# Altium PCB PCB1.PcbDoc
Units mm, origin at the board's own origin, x right, y up, seen from the top; angles counter-clockwise.
Board outline 129.79 x 36.83 mm, 2 copper layers (Top Layer, Bottom Layer); 11 components, 0 nets, 23 pads, 26 vias.
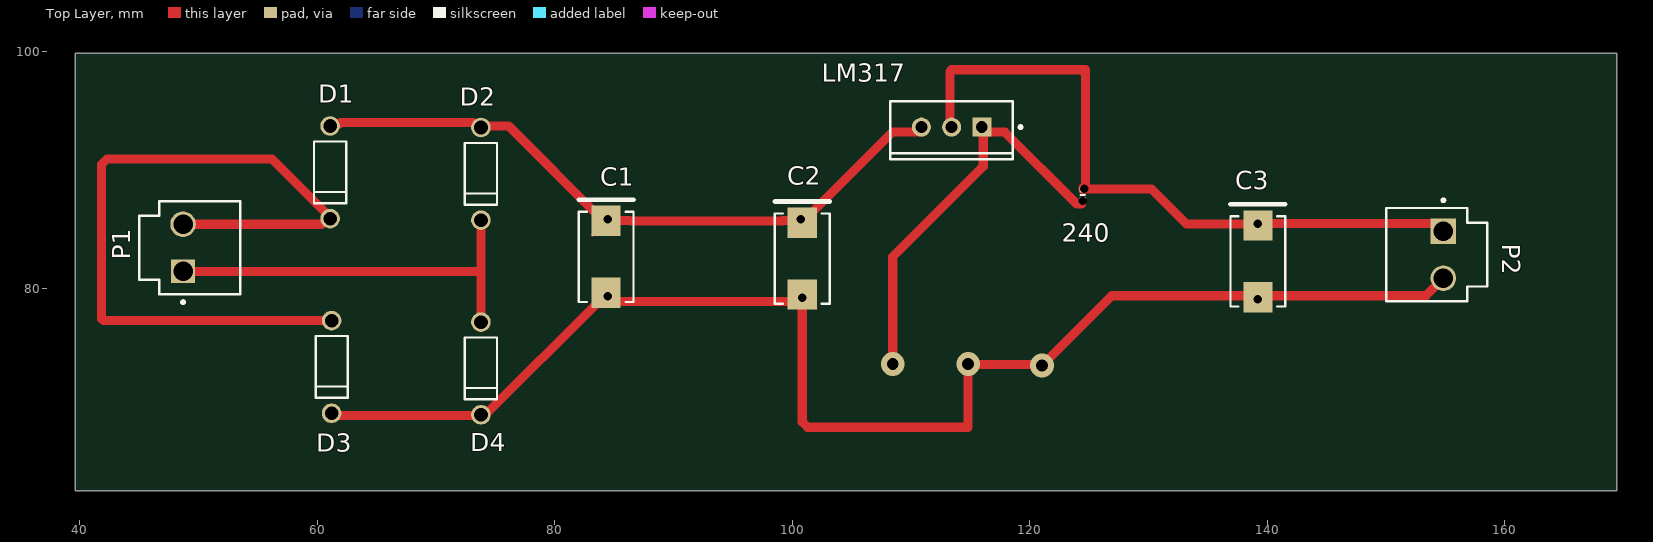
[diagram p0: Top Layer view]
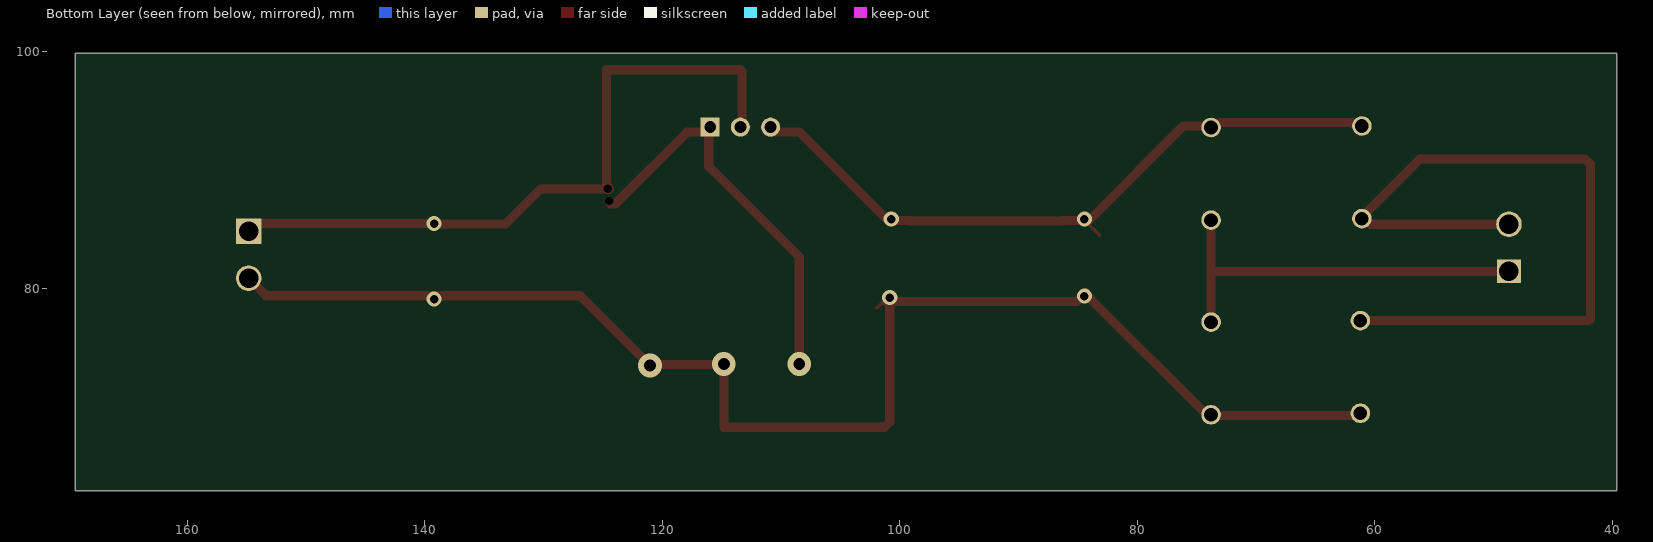
[diagram p1: Bottom Layer view, seen from below]

## Layer stack, top to bottom
Top Solder: solder mask 0.0102, Solder Resist, Dk 3.5
Top Layer: signal copper 0.0356
Dielectric 1: dielectric 0.32, FR-4, Dk 4.8
Bottom Layer: signal copper 0.0356
Bottom Solder: solder mask 0.0102, Solder Resist, Dk 3.5

## Board outline
39.624,62.992 39.624,99.822 169.418,99.822 169.418,62.992

## Design rules (kind name [scope] priority, off if disabled: settings)
Clearance [All] p1: gap=0.254 ignorepadtopadclearanceinfootprint=FALSE except(0: Arc-Hole Track-Hole SMDPad-Hole THPad-Hole Via-Hole Fill-Hole Poly-Hole Region-Hole Text-Hole)
PolygonConnect [All] p1: connectstyle=Relief reliefconductorwidth=0.254 reliefentries=4 polygonreliefangle="90 Angle" airgapwidth=0.254
RoutingVias [All] p1: holewidth=0.711 width=1.27 viastyle="Through Hole" minholewidth=0.711 minwidth=1.27 maxholewidth=0.711 maxwidth=1.27
SolderMaskExpansion [All] p1: expansion=0.102 istentingtop=FALSE
Width [All] p1: maxlimit=0.254 minlimit=0.254 preferedwidth=0.254
30 further rules are at their usual default settings.

## Components (designator, comment, footprint, x,y, rotation, side; value= is the part's Value field where it differs from the comment)
240 "Resistor 240R +/-5 % 0402 63 mW" RESC0402(1005)_L 124.46,87.884 r90 top value=240
C1 "293D476X9016D2TE3" VISH-7343-31_N#1 84.328,82.677 r270 top value=2200µF
C2 "293D476X9016D2TE3" VISH-7343-31_N#2 100.838,82.527 r270 top value=0.33µF
C3 "293D476X9016D2TE3" VISH-7343-31_N#2 139.192,82.296 r270 top value=100uF
D1 "1N4007" FAIR-DO-41-2#1 61.087,89.789 r270 top
D2 "1N4007" FAIR-DO-41-2#1 73.787,89.662 r270 top
D3 "1N4007" FAIR-DO-41-2#1 61.214,73.406 r270 top
D4 "1N4007" FAIR-DO-41-2#2 73.787,73.279 r270 top
LM317 "LM317LM" ONSC-TO-220-3-221AB-01 113.411,93.599 r270 top (schematic designator VREG?)
P1 "INPUT-AC 220V" JST-B2P-VH(LF)(SN)_V#1 50.108,83.439 r90 top
P2 "OUTPUT-DC 12V" JST-B2P-VH(LF)(SN)_V#2 153.413,82.856 r270 top

## Footprints (in the part's own frame and the unit in brackets; to place one, negate y for a bottom-side part, rotate by r counter-clockwise, add the part's x,y. Pads: shape width x height; smd on the part's side, far side on the other; paste and mask are expansions set on the pad)
FAIR-DO-41-2#1 [mm] "THD, 2-Leads, Body 5.2x2.72mm, Pin Spacing 7.8mm"
  round 1.65 hole 1.15: 2(-3.9,0) 2(3.9,0)
  silkscreen extent -2.6,-1.35 2.6,1.35, body extent -4.29,-1.17 4.29,1.17, height 2.35
FAIR-DO-41-2#2 [mm] "THD, 2-Leads, Body 5.2x2.72mm, Pin Spacing 7.8mm"
  round 1.65 hole 1.15: 1(-3.9,0) 2(3.9,0)
  silkscreen extent -2.6,-1.35 2.6,1.35, body extent -4.29,-1.17 4.29,1.17, height 2.35
JST-B2P-VH(LF)(SN)_V#1 [mm] "THD, 2-Leads, Body 8.5x7.86mm, Pitch 3.96mm"
  rect 2x2 hole 1.65: 2(-1.98,1.4)
  round 2.15 hole 1.65: 2(1.98,1.4)
  silkscreen extent -4.7,-3.4 3.93,5.1, body extent -3.93,-3.2 3.93,5.3, height 10.9
JST-B2P-VH(LF)(SN)_V#2 [mm] "THD, 2-Leads, Body 8.5x7.86mm, Pitch 3.96mm"
  rect 2.15x2.15 hole 1.65: 1(-1.98,1.4)
  round 2.15 hole 1.65: 2(1.98,1.4)
  silkscreen extent -4.7,-3.4 3.93,5.1, body extent -3.93,-3.2 3.93,5.3, height 10.9
ONSC-TO-220-3-221AB-01 [mm] "FM, 3-Leads, Body 10.3x4.85mm, Pitch 2.54mm"
  rect 1.6x1.6 hole 1: 2(0,2.54)
  round 1.6 hole 1: 2(0,0) 3(0,-2.54)
  silkscreen extent -2.19,-5.15 2.72,5.93, body extent -2.16,-5.15 2.69,5.15, height 19.68
RESC0402(1005)_L [mm] "Chip Resistor, Body 1.0x0.5mm, IPC High Density"
  rrect25% 0.5x0.55 smd: 1(-0.45,0) 2(0.45,0)
  silkscreen extent 0,-0.2 0,0.2, body extent -0.5,-0.25 0.5,0.25, height 0.3
VISH-7343-31_N#1 [mm] "Molded Capacitor, 2-Leads, Body 7.6x4.6mm, IPC Medium Density"
  rect 2.55x2.45 smd: 2(-3.025,0) 2(3.025,0)
  silkscreen extent -4.8,-2.3 3.8,2.3, body extent -4.02,-2.3 4.02,2.3, height 3.1
VISH-7343-31_N#2 [mm] "Molded Capacitor, 2-Leads, Body 7.6x4.6mm, IPC Medium Density"
  rect 2.55x2.45 smd: 1(-3.025,0) 2(3.025,0)
  silkscreen extent -4.8,-2.3 3.8,2.3, body extent -4.02,-2.3 4.02,2.3, height 3.1

## Part data
240: library part CMP-009-00155-3, "Chip Resistor, 240 Ohms, +/-5 %, 63 mW, -55 to 155 degC, 0402", Case/Package=0402, Max Operating Temperature=155°C, Min Operating Temperature=-55°C, Power=63mW, Tolerance=5%, Pins=2
C1 C2 C3: library part CMP-001-00022-7, "Solid Tantalum Chip Capacitor, 47 uF, +/- 10%, 16 V, -55 to 125 degC, 2917 (7343 Metric), RoHS, Tape and Reel", Capacitor Type=Tantalum, Case/Package=7343-31, Manufacturer="Vishay Semiconductor", Max Operating Temperature=125°C, Min Operating Temperature=-55°C, Package Description="2-Pin Surface Mount Device, Body 7.3 x 4.3 mm", Tolerance=10%, Voltage Rating=16V, Datasheet URL=http://www.vishay.com/docs/40002/293d.pdf, Datasheet Version=Aug-16, Manufacturer URL=http://www.vishay.com/, Mounting Technology=SM, Package Reference=7343-31, Packaging=TapeandReel, RoHS Compliant=Unknown
D1 D2 D3 D4: library part CMP-004-00007-2, "General Purpose Rectifier, 1.1 V, 1.0 A, -55 to 175 degC, 2-Pin DO-41, RoHS, Tape and Reel", Case/Package=DO-41-2, Forward Current=1A, Forward Voltage=1.1V, Manufacturer=Fairchild, Max Operating Temperature=175°C, Max Surge Current=30A, Min Operating Temperature=-55°C, Package Description="2-Pin Axial Lead, Dia 2.375 mm, Body Length 4.63 mm", Package Quantity=5000, Package Version="Rev. 2, 09/2008", Peak Reverse Current=5uA, Datasheet URL=https://www.fairchildsemi.com/datasheets/1N/1N4007.pdf, Datasheet Version="Rev. 1.1.0, 11/2014", Elements=1, Manufacturer URL=https://www.fairchildsemi.com/, Mounting Technology=TH, Package Reference=DO-41-2, Package URL=http://www.fairchildsemi.com/dwg/DO/DO41A.pdf, Packaging=TapeandReel, Pins=2, RoHS Compliant=True
LM317: library part CMP-019-00023-3, "Adjustable Output, Positive Voltage Regulator, 1.5 A, 0 to 125 degC, 3-Pin TO-220 (221AB-01), Pb-Free, Rail", Case/Package=TO-220, Manufacturer="ON Semiconductor", Max Operating Temperature=125°C, Max Ouput Current=1.5A, Max Input Voltage=40V, Min Operating Temperature=0°C, Min Input Voltage=4.2V, Output Voltage=1.2V, Package Description="3-Pin Flange Mount, Vertical Straight Lead, Body 9.97 x 4.445 mm, Pitch 2.54 mm", Package Quantity=50, Package Reference=TO-220-3-221AB-01, Package Version="Rev. A, 11/2010", Datasheet URL=http://www.onsemi.com/pub_link/Collateral/LM317-D.PDF, Datasheet Version="Rev. 14, 01/2016", Manufacturer URL=http://www.onsemi.com/, Mounting Technology=TH, Output Current=1.5A, Outputs=1, Packaging=Rail/Tube, Pins=3, RoHS Compliant=True
P1 P2: library part CMP-002-00025-2, "Male Header, Pitch 3.96 mm, 1 x 2 Position, Height 10.9 mm, Tail Length 3.7 mm, -25 to 85 degC, RoHS, Bulk", Case/Package=B2P-VH(LF)(SN), Manufacturer=JST, Max Operating Temperature=85°C, Min Operating Temperature=-25°C, Package Description="Male Header, Pitch 3.96 mm, 1 x 2 Position, Height 10.9 mm, Tail Length 3.7 mm", Connector Type=Header, Datasheet URL=http://www.jst-mfg.com/product/pdf/eng/eVH.pdf, Datasheet Version=May-16, Gender=Male, Manufacturer URL=http://www.jst.com/home2.html, Mounting Technology=TH, Package Reference=B2P-VH(LF)(SN), RoHS Compliant=Unknown

## Via types
v1: diameter 1.27, hole 0.711, Top Layer to Bottom Layer, 21 vias
v2: diameter 2, hole 1, Top Layer to Bottom Layer, 3 vias
v3: diameter 0/0 (per signal layer), hole 0.711, Top Layer to Bottom Layer, 2 vias

## Nets (pads, with @x,y where several pads share a name; then routed paths per layer and width w, separated by ;. In a path a pad name is that pad's centre, name@x,y a point inside that pad or via, vN(x,y) a via of type N, cw(c..) or ccw(c..) an arc to the next point about the centre after c; other vN are vias at no path point)
pads on no net: 240.1 240.2 C1.2 C2.1 C2.2 C3.1 C3.2 D1.2 D2.2 D3.2 D4.1 D4.2 LM317.2 LM317.3 P1.2 P2.1 P2.2
copper on no net: | length 370.6
  Top Layer w0.254: 41.851,77.455 42,77.306 ; v1(48.708,81.459) v1@48.734,81.433 ; v1@61.09,85.762 v1@61.468,85.762 ; v1@61.169,69.461 v1(61.214,69.506) v1@61.404,69.315 ; v1@73.596,69.569 v1(73.787,69.379) ; v1@73.66,77.306 v1(73.787,77.179) ; v1(73.787,85.762) v1@73.914,85.635 ; 83.168,84.492 84.328,85.652 v1@84.328,85.702 ; v1@100.815,85.529 v1@100.838,85.552 ; v1@100.838,79.452 v1@100.838,79.502 ; v1@101.103,79.187 101.267,79.023 101.936,78.354 101.986,78.354 ; 113.262,98.276 113.411,98.425 ; v1@113.538,93.218 v1@113.665,93.345 ; 114.808,68.326 114.957,68.475 ; 124.692,98.425 124.841,98.276
  Top Layer w0.762: 41.851,77.455 41.851,90.454 42.298,90.9 56.203,90.9 v1@61.214,85.889 ; 42,77.306 v1(61.214,77.306) ; v1@48.384,85.419 60.366,85.419 v1@60.836,85.889 ; v1@48.41,81.433 73.787,81.433 ; v1(61.087,93.689) 61.257,93.859 61.856,93.859 61.977,93.98 73.129,93.98 73.547,93.562 v1(73.787,93.562) ; v1@61.404,69.315 v1@73.724,69.315 ; v1@73.787,77.052 73.787,81.433 ; v1@73.787,85.635 73.787,81.433 ; v1@73.787,93.689 76.11,93.689 84.074,85.725 86.286,85.725 ; v1@73.914,69.125 83.901,79.112 v1@84.014,79.148 ; v1@84.328,79.652 85.059,78.921 v1@100.838,78.921 ; 86.36,85.702 99.164,85.702 ; 99.187,85.725 100.965,85.725 108.42,93.18 v1@110.871,93.18 ; v1(100.838,79.248) v1@100.838,78.921 ; v1@101.165,78.921 v1@100.838,78.921 ; v2(108.458,73.66) 108.458,82.664 116.078,90.284 v1@116.078,93.18 ; v1@113.262,93.748 113.262,98.276 ; 113.411,98.425 124.692,98.425 124.692,88.701 124.46,88.469 124.46,88.334 124.595,88.334 124.653,88.392 130.233,88.392 133.177,85.448 v1@139.192,85.448 ; v1@116.078,93.471 116.369,93.18 117.894,93.18 123.952,87.122 v3@124.333,87.122 ; 124.46,98.276 124.46,98.425 ; v1@139.192,85.321 139.342,85.471 154.178,85.471 v1(154.813,84.836) ; v1(154.813,80.876) 153.335,79.398 139.192,79.398 126.896,79.398 123.595,76.097 v2(121.031,73.533) 120.968,73.596 114.871,73.596 v2(114.808,73.66) 114.808,68.326 101.284,68.326 100.838,68.772 v1@100.838,78.921
  other v1: 139.192,79.121 84.455,79.375 48.708,85.419 139.192,85.471 84.455,85.852 100.711,85.852 61.087,85.889 110.871,93.599 113.411,93.599 115.951,93.599
  other v3: 124.46,87.376 124.587,88.392

## Silkscreen, mask and mechanical layers (free items; w line width, h text height)
Mechanical 1:
  lines w0.254: 39.624,62.992 39.624,99.822 169.418,99.822 169.418,62.992 164.465,62.992 39.624,62.992